# EAGLE board BUZZI-11 (EAGLE 4.15)
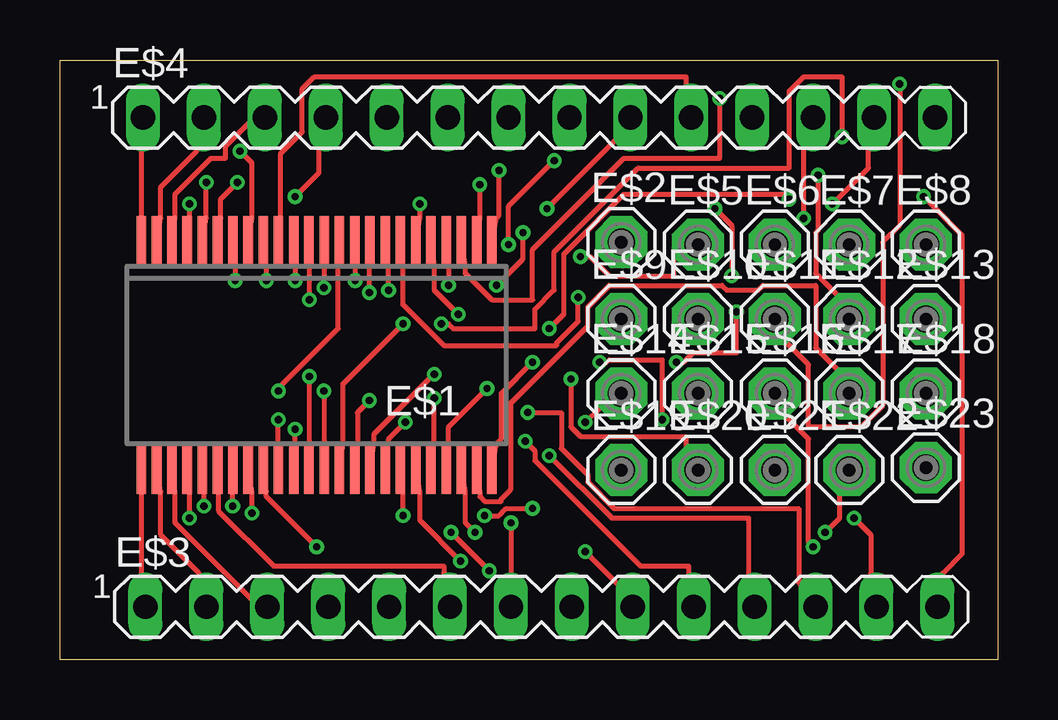
[diagram p0: board, top side]
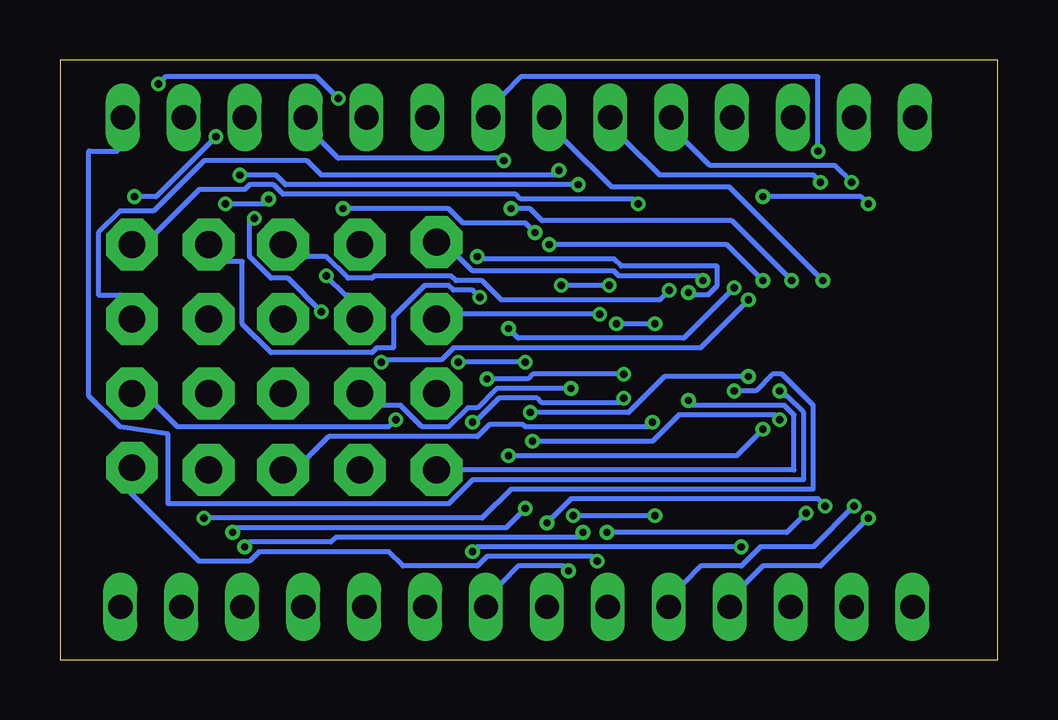
[diagram p1: board, bottom side, seen from below]

Size 39.1 x 25 mm. Coordinates in mm from the lower left corner, seen from the top.
Outline: 0,25 39.1,25 39.1,0 0,0 0,25
Copper layers (1*16): Top 0.035mm / dielectric 1.5mm / Bottom 0.035mm
Design rules "PCB-POOL": minimum track width 6mil, minimum drill 12mil, track to track 6mil, track to pad 6mil, pad to pad 6mil, via to via 6mil, smd to smd 6mil, copper to edge 20mil, drill to drill 8mil, minimum pad ring 8mil, minimum via ring 6mil, stop-mask expansion 3mil, vias tented up to drill 0mil, thermal gap 8mil
Net classes: 0 default: width 0.2 mm

## Footprints (pad centres in the part's own frame; a part is rotated, then mirrored left to right if it is on the bottom)
SSO48 = smd 0.4 x 2.2: 1 -7.303,-4.7; 2 -6.668,-4.7; 3 -6.033,-4.7; 4 -5.398,-4.7; 5 -4.763,-4.7; 6 -4.128,-4.7; 7 -3.493,-4.7; 8 -2.858,-4.7; 9 -2.223,-4.7; 10 -1.588,-4.7; 11 -0.953,-4.7; 12 -0.318,-4.7; 13 0.318,-4.7; 14 0.953,-4.7; 15 1.588,-4.7; 16 2.223,-4.7; 17 2.858,-4.7; 18 3.493,-4.7; 19 4.128,-4.7; 20 4.763,-4.7; 21 5.398,-4.7; 22 6.033,-4.7; 23 6.668,-4.7; 24 7.303,-4.7; 25 7.303,4.7; 26 6.668,4.7; 27 6.033,4.7; 28 5.398,4.7; 29 4.763,4.7; 30 4.128,4.7; 31 3.493,4.7; 32 2.858,4.7; 33 2.223,4.7; 34 1.588,4.7; 35 0.953,4.7; 36 0.318,4.7; 37 -0.318,4.7; 38 -0.953,4.7; 39 -1.588,4.7; 40 -2.223,4.7; 41 -2.858,4.7; 42 -3.493,4.7; 43 -4.128,4.7; 44 -4.763,4.7; 45 -5.398,4.7; 46 -6.033,4.7; 47 -6.668,4.7; 48 -7.303,4.7
SE11 = drill 1.118 pad 2.159 octagon: MP 0,0
MA14-1 = drill 1.016 long: 1 -15.24,0; 2 -12.7,0; 3 -10.16,0; 4 -7.62,0; 5 -5.08,0; 6 -2.54,0; 7 0,0; 8 2.54,0; 9 5.08,0; 10 7.62,0; 11 10.16,0; 12 12.7,0; 13 15.24,0; 14 17.78,0

## Placement (x,y rotation side)
E$1  [SSO48]  10.7,12.7 180 top
E$2  [SE11]  23.4,17.4 0 top
E$3  [MA14-1]  18.8,2.2 0 top
E$4  [MA14-1]  18.7,22.6 0 top
E$5  [SE11]  26.6,17.3 0 top
E$6  [SE11]  29.8,17.3 0 top
E$7  [SE11]  32.9,17.3 0 top
E$8  [SE11]  36.1,17.3 0 top
E$9  [SE11]  23.4,14.2 0 top
E$10  [SE11]  26.6,14.2 0 top
E$11  [SE11]  29.8,14.2 0 top
E$12  [SE11]  32.9,14.2 0 top
E$13  [SE11]  36.1,14.2 0 top
E$14  [SE11]  23.4,11.1 0 top
E$15  [SE11]  26.6,11.1 0 top
E$16  [SE11]  29.8,11.1 0 top
E$17  [SE11]  32.9,11.1 0 top
E$18  [SE11]  36.1,11.1 0 top
E$19  [SE11]  23.4,7.9 0 top
E$20  [SE11]  26.6,7.9 0 top
E$21  [SE11]  29.8,7.9 0 top
E$22  [SE11]  32.9,7.9 0 top
E$23  [SE11]  36.1,8 0 top

## Library data of the parts
E$1 = smd-ipc
E$2 E$5-E$23 = solpad
E$3 E$4 = con-lstb

## Nets
S$1: E$1.10 E$2.MP
S$2: E$1.9 E$5.MP
S$3: E$1.8 E$6.MP
S$4: E$1.7 E$7.MP
S$5: E$1.6 E$8.MP
S$6: E$1.5 E$9.MP
S$7: E$1.4 E$10.MP
S$8: E$1.3 E$11.MP
S$9: E$1.2 E$12.MP
S$10: E$1.1 E$13.MP
S$11: E$1.39 E$19.MP
S$12: E$1.40 E$20.MP
S$13: E$1.24 E$4.1
S$14: E$1.41 E$21.MP
S$15: E$1.42 E$22.MP
S$16: E$1.43 E$23.MP
S$17: E$1.23 E$4.2
S$18: E$1.22 E$4.3
S$19: E$1.21 E$4.4
S$20: E$1.20 E$4.5
S$21: E$1.19 E$4.6
S$22: E$1.18 E$4.7
S$23: E$1.17 E$4.8
S$24: E$1.16 E$4.9
S$25: E$1.15 E$4.10
S$26: E$1.14 E$4.11
S$27: E$1.13 E$4.12
S$28: E$1.12 E$4.13
S$29: E$1.11 E$4.14
S$30: E$1.25 E$3.1
S$31: E$1.26 E$3.2
S$32: E$1.27 E$3.3
S$33: E$1.28 E$3.4
S$34: E$1.29 E$3.5
S$35: E$1.30 E$3.6
S$36: E$1.31 E$3.7
S$37: E$1.32 E$3.8
S$38: E$1.33 E$3.9
S$39: E$1.34 E$3.10
S$40: E$1.35 E$3.11
S$41: E$1.36 E$3.12
S$42: E$1.37 E$3.13
S$43: E$1.38 E$3.14
S$44: E$1.44 E$14.MP
S$45: E$1.45 E$15.MP
S$46: E$1.46 E$16.MP
S$47: E$1.47 E$17.MP
S$48: E$1.48 E$18.MP

## Tracks (layer width: path | path; a pad name or v marks a point on that pad's centre or on a via)
S$1  (via drill 0.3)
  Top 0.2: v12.3,15.8 12.3,16.4 E$1.10
  Bottom 0.2: v12.3,15.8 12.5,16 15.8,16 16,16.2 21.9,16.2 22.5,16.8 E$2.MP
S$2  (via drill 0.3)
  Top 0.2: v12.9,15.3 12.9,16.4 E$1.9 | v21.7,16.8 22.1,16.8 22.9,16 25.6,16 25.6,16.8 E$5.MP
  Bottom 0.2: v12.9,15.3 12.8,15.2 12.1,15.2 11.7,15.6 11.7,16.4 15.7,16.4 16,16.7 21.6,16.7 v21.7,16.8
S$3  (via drill 0.3)
  Top 0.2: v13.7,15.4 13.7,16.4 E$1.8
  Bottom 0.2: v13.7,15.4 14.1,15 20.7,15 21.5,15.8 22.6,15.8 22.8,16 26,16 26.1,15.9 27.1,15.9 28,16.8 28.8,16.8 E$6.MP
S$4  (via drill 0.3)
  Top 0.2: v21.6,15.1 21.6,14.1 20.7,13.2 20.7,13.1 16,13.1 14.3,14.8 14.3,16.4 E$1.7
  Bottom 0.2: v21.6,15.1 21.9,15.4 22.7,15.4 22.9,15.6 23.9,15.6 25.2,14.3 25.2,13 25.9,13 26.1,12.8 30.3,12.8 31.5,14 31.5,16.6 32.1,16.6 E$7.MP
S$5  (via drill 0.3)
  Top 0.2: v15,19 15,18.4 E$1.6
  Bottom 0.2: v15,19 15.2,19.2 19.9,19.2 20.1,19.4 29.8,19.4 30.2,19.8 31.2,19.8 31.4,19.6 33.3,19.6 35.1,17.8 E$8.MP
S$6  (via drill 0.3)
  Top 0.2: v16.6,14.4 15.6,15.4 15.6,16.4 E$1.5
  Bottom 0.2: v16.6,14.4 22.4,14.4 E$9.MP
S$7  (via drill 0.3)
  Top 0.2: v16.2,15.6 16.2,16.4 E$1.4 | v18.2,15.6 19.3,16.7 v19.3,17.8 | v27.3,18.8 28,18.1 v28,16
  Bottom 0.2: v16.2,15.6 v18.2,15.6 | v19.3,17.8 19.7,18.2 22.3,18.2 22.9,18.8 v27.3,18.8 | v28,16 27.2,15.2 27.1,15.2 E$10.MP
S$8  (via drill 0.3)
  Top 0.2: v27.5,23.4 27.5,20.9 23.5,20.9 19.7,17.1 19.7,15 18,15 16.9,16.1 16.9,16.4 E$1.3 | v35,24 35,18.1 34.3,17.4 34.3,10.6 33.4,9.7 31.2,9.7 31.2,12.3 30.3,13.2 E$11.MP
  Bottom 0.2: v27.5,23.4 28.4,24.3 34.7,24.3 v35,24
S$9  (via drill 0.3)
  Top 0.2: v17.5,19.8 17.5,18.4 E$1.2 | v31.6,20.2 31.6,17.9 31.5,17.8 31.5,16.1 32.4,15.2 E$12.MP
  Bottom 0.2: v17.5,19.8 29.7,19.8 30.1,20.2 v31.6,20.2
S$10  (via drill 0.3)
  Top 0.2: v18.3,20.4 18.3,18.5 18.2,18.4 E$1.1
  Bottom 0.2: v18.3,20.4 18.5,20.2 28.2,20.2 28.8,20.8 33.1,20.8 35.2,18.7 36.6,18.7 37.5,17.8 37.5,15.2 36.6,15.2 E$13.MP
S$11  (via drill 0.3)
  Top 0.2: v12.9,10.8 12.4,10.3 12.4,9 E$1.39
  Bottom 0.2: v12.9,10.8 12.7,10.6 8.9,10.6 8.5,10.2 8.5,7.9 E$19.MP
S$12  (via drill 0.3)
  Top 0.2: v15.6,11.9 13.1,9.4 13.1,9 E$1.40 | v21.3,11.7 21.3,9.7 21.7,9.3 26.1,9.3 26.1,8.9 E$20.MP
  Bottom 0.2: v15.6,11.9 19.4,11.9 19.6,11.7 v21.3,11.7
S$13
  Top 0.2: E$1.24 3.4,18.4 3.4,21.2 E$4.1
S$14  (via drill 0.3)
  Top 0.2: v14.4,9.9 13.7,9.2 13.7,9 E$1.41
  Bottom 0.2: v14.4,9.9 14.6,9.7 19.7,9.7 19.8,9.8 21.2,9.8 21.7,9.3 27.9,9.3 28.8,8.4 E$21.MP
S$15  (via drill 0.3)
  Top 0.2: v14.3,6 14.3,7 E$1.42 | v17.7,6 18.3,6 18.6,6.3 v19.7,6.3 | v31.9,5.3 32.5,5.9 32.5,7 E$22.MP
  Bottom 0.2: v14.3,6 v17.7,6 | v19.7,6.3 20.5,5.5 31.7,5.5 v31.9,5.3
S$16  (via drill 0.3)
  Top 0.2: v16.7,4.1 15,5.8 15,7 E$1.43
  Bottom 0.2: v16.7,4.1 16.9,4.3 21.3,4.3 21.7,3.9 24.8,3.9 25.4,4.5 30.8,4.5 31.2,4.1 33.3,4.1 36.2,7 E$23.MP
S$17
  Top 0.2: E$1.23 4.2,18.4 4.2,19.7 5.7,21.2 E$4.2
S$18
  Top 0.2: E$1.22 4.8,18.4 4.8,19.4 6.3,20.9 6.9,20.9 6.9,21.4 7.9,22.4 E$4.3
S$19  (via drill 0.3)
  Top 0.2: v5.4,19 5.4,18.4 E$1.21 | v9.8,19.3 10.8,20.3 10.8,21.2 E$4.4
  Bottom 0.2: v5.4,19 5.7,19.3 v9.8,19.3
S$20  (via drill 0.3)
  Top 0.2: v6.1,19.9 6.1,18.4 E$1.20
  Bottom 0.2: v6.1,19.9 6.8,20.6 12,20.6 13,21.6 E$4.5
S$21  (via drill 0.3)
  Top 0.2: v7.4,19.9 6.7,19.2 6.7,18.4 E$1.19
  Bottom 0.2: v7.4,19.9 7.7,20.2 14.1,20.2 15.5,21.6 E$4.6
S$22  (via drill 0.3)
  Top 0.2: v7.3,15.8 7.3,16.4 E$1.18
  Bottom 0.2: v7.3,15.8 11.2,19.7 16.1,19.7 18,21.6 E$4.7
S$23  (via drill 0.3)
  Top 0.2: v7.5,21.2 8,20.7 8,18.4 E$1.17
  Bottom 0.2: v7.5,21.2 7.5,24.3 19.9,24.3 20.6,23.6 E$4.8
S$24  (via drill 0.3)
  Top 0.2: v8.6,15.8 8.6,16.4 E$1.16 | v20.3,18.8 23.1,21.6 E$4.9
  Bottom 0.2: v8.6,15.8 11.1,18.3 19,18.3 19.5,18.8 v20.3,18.8
S$25
  Top 0.2: E$1.15 9.2,18.4 9.2,21.1 10.1,22 10.1,23.8 10.6,24.3 26.1,24.3 26.1,24 E$4.10
S$26  (via drill 0.3)
  Top 0.2: v9.8,15.8 9.8,16.4 E$1.14 | v18.7,17.3 18.7,18.9 v20.6,20.8
  Bottom 0.2: v9.8,15.8 11.3,17.3 v18.7,17.3 | v20.6,20.8 20.7,20.9 27.5,20.9 28.2,21.6 E$4.11
S$27  (via drill 0.3)
  Top 0.2: v10.4,15 10.4,16.4 E$1.13 | v25.7,12.4 26,12.4 26.4,12.8 28.2,12.8 v28.2,14.5 | v31,18.4 31,21.3 E$4.12
  Bottom 0.2: v10.4,15 12.4,13 22.7,13 23.2,12.5 25.6,12.5 v25.7,12.4 | v28.2,14.5 29.6,15.9 30.3,15.9 31.2,16.8 31.2,18.4 v31,18.4
S$28  (via drill 0.3)
  Top 0.2: v11,15.5 11,16.4 E$1.12 | v20.4,13.8 21,14.4 21,16.9 23.5,19.4 30.4,19.4 v30.4,19.2 | v32.2,19 33.7,20.5 33.7,21.2 E$4.13
  Bottom 0.2: v11,15.5 13.1,13.4 20,13.4 v20.4,13.8 | v30.4,19.2 30.6,19 v32.2,19
S$29  (via drill 0.3)
  Top 0.2: v9.1,11.2 9.1,11.3 11.6,13.8 11.6,16.4 E$1.11
  Bottom 0.2: v9.1,11.2 8.9,11 8.8,11 8.1,10.3 8.1,7.5 21.9,7.5 22.9,6.5 34.6,6.5 34.6,9.4 36.6,9.7 37.9,11 37.9,21.2 36.7,21.2 E$4.14
S$30
  Top 0.2: E$1.25 3.4,7 3.4,3.6 E$3.1
S$31
  Top 0.2: E$1.26 4.2,7 4.2,5.2 5.8,3.6 E$3.2
S$32
  Top 0.2: E$1.27 4.8,7 4.8,5.7 8,2.5 E$3.3
S$33  (via drill 0.3)
  Top 0.2: v5.4,5.9 5.4,7 E$1.28
  Bottom 0.2: v5.4,5.9 7.4,3.9 9.8,3.9 10.5,3.2 E$3.4
S$34  (via drill 0.3)
  Top 0.2: v6,6.4 6,7 E$1.29
  Bottom 0.2: v6,6.4 7.7,4.7 9.9,4.7 10.7,3.9 12.4,3.9 13.1,3.2 E$3.5
S$35
  Top 0.2: E$1.30 6.6,7 6.6,6.2 8.9,3.9 16,3.9 16,3.6 E$3.6
S$36  (via drill 0.3)
  Top 0.2: v7.2,6.4 7.2,7 E$1.31 | v18.8,5.7 E$3.7
  Bottom 0.2: v7.2,6.4 7.5,6.7 17.8,6.7 v18.8,5.7
S$37  (via drill 0.3)
  Top 0.2: v8,6.1 8,7 E$1.32 | v16.3,5.3 v17.9,3.7
  Bottom 0.2: v8,6.1 8.8,5.3 v16.3,5.3 | v17.9,3.7 18.1,3.9 20,3.9 20.7,3.2 E$3.8
S$38  (via drill 0.3)
  Top 0.2: v10.7,4.7 8.6,6.8 8.6,7 E$1.33 | v21.9,4.5 23.2,3.2 E$3.9
  Bottom 0.2: v10.7,4.7 21.7,4.7 v21.9,4.5
S$39  (via drill 0.3)
  Top 0.2: v9.1,10 9.1,9 E$1.34 | v19.4,9.1 19.8,8.7 19.8,8.3 24.2,3.9 26.2,3.9 26.2,3.6 E$3.10
  Bottom 0.2: v9.1,10 9.3,10.2 13.3,10.2 14.4,9.1 v19.4,9.1
S$40  (via drill 0.3)
  Top 0.2: v9.8,9.6 9.8,9 E$1.35 | v20.4,8.5 23,5.9 28.7,5.9 28.7,3.6 E$3.11
  Bottom 0.2: v9.8,9.6 10.9,8.5 v20.4,8.5
S$41  (via drill 0.3)
  Top 0.2: v10.4,11.8 10.4,9 E$1.36 | v19.5,10.3 20.9,10.3 20.9,8.8 22,7.7 22,7.4 23.1,6.3 30.8,6.3 30.8,3.2 E$3.12
  Bottom 0.2: v10.4,11.8 13.9,11.8 15.4,10.3 v19.5,10.3
S$42  (via drill 0.3)
  Top 0.2: v11,11.2 11,9 E$1.37 | v33.1,5.9 33.8,5.2 33.8,3.6 E$3.13
  Bottom 0.2: v11,11.2 10.1,11.2 9.4,11.9 9,11.9 7.7,10.6 7.7,7.1 20.3,7.1 21.5,5.9 v33.1,5.9
S$43  (via drill 0.3)
  Top 0.2: v14.3,14 11.8,11.5 11.8,9 E$1.38 | v15.9,14 16.2,14 16.4,13.8 19.8,13.8 19.8,14.6 20.6,15.4 20.6,17 24.1,20.5 30.4,20.5 30.4,23.7 31,24.3 32.6,24.3 v32.6,21.8 | v36,19.3 37.6,17.7 37.6,4.4 36.8,3.6 E$3.14
  Bottom 0.2: v14.3,14 v15.9,14 | v32.6,21.8 35.1,19.3 v36,19.3
S$44  (via drill 0.3)
  Top 0.2: v15.6,10.9 15.6,9 E$1.44 | v21.9,9.9 22.5,10.5 E$14.MP
  Bottom 0.2: v15.6,10.9 15.8,10.7 19,10.7 19.2,10.9 20.8,10.9 21.8,9.9 v21.9,9.9
S$45  (via drill 0.3)
  Top 0.2: v17.8,11.3 16.2,9.7 16.2,9 E$1.45
  Bottom 0.2: v17.8,11.3 20.9,11.3 21.7,10.5 22.1,10.5 22.9,9.7 24,9.7 24.9,10.6 25.6,10.6 E$15.MP
S$46  (via drill 0.3)
  Top 0.2: v17.3,5.3 16.9,5.7 16.9,7 E$1.46 | v31.4,4.7 31.2,4.9 31.2,9.2 30.3,10.1 E$16.MP
  Bottom 0.2: v17.3,5.3 17.5,5.1 27.6,5.1 27.8,4.9 31.2,4.9 v31.4,4.7
S$47
  Top 0.2: E$1.47 17.5,7 17.5,6.8 17.7,6.6 18.4,6.6 18.4,6.7 18.8,7.1 18.8,10.7 22,13.9 22,14.7 22.9,15.6 27.6,15.6 27.8,15.4 29.1,15.4 29.3,15.6 31.5,15.6 31.5,13 32.4,12.1 E$17.MP
S$48  (via drill 0.3)
  Top 0.2: v19.7,12.4 18.4,11.1 18.4,9.2 18.2,9 E$1.48 | v22.5,12.4 22.8,12.4 22.9,12.5 25.1,12.5 v25.1,10
  Bottom 0.2: v19.7,12.4 v22.5,12.4 | v25.1,10 25.4,9.7 34.2,9.7 35.1,10.6 E$18.MP